# EAGLE board Stepper (EAGLE 9.7.0)

Size 235.86 x 111.59 mm. Coordinates in mm from the lower left corner, seen from the top.
Outline: 0,0 235.86,0 235.86,111.59 0,111.59 0,0
Copper layers (1*16): Top 0.035mm / dielectric 1.5mm / Bottom 0.035mm
Design rules "default": minimum track width 6mil, minimum drill 0.35mm, track to track 6mil, track to pad 6mil, pad to pad 6mil, via to via 6mil, smd to smd 6mil, copper to edge 40mil, drill to drill 6mil, minimum pad ring 10mil, minimum via ring 8mil, stop-mask expansion 4mil, vias tented up to drill 0mil, thermal gap 10mil

## Footprints (pad centres in the part's own frame; a part is rotated, then mirrored left to right if it is on the bottom)
BATTERY-GENERIC = drill 1.118 pad 3.15 octagon: + 2.54,0; - -2.54,0
LEDRD254W60D565H860B_O = drill 0.981 pad 1.581: 1 -1.27,0; 2 1.27,0
LEDRD254W60D565H860B_Y = drill 0.981 pad 1.581: 1 -1.27,0; 2 1.27,0
LEDRD254W60D565H860B_B = drill 0.981 pad 1.581: 1 -1.27,0; 2 1.27,0
LEDRD254W60D565H860B_G = drill 0.981 pad 1.581: 1 -1.27,0; 2 1.27,0
1X06 = drill 1.016 long: 1 -6.35,0; 2 -3.81,0; 3 -1.27,0; 4 1.27,0; 5 3.81,0; 6 6.35,0
RESAD1016W63L850D250B = drill 0.83 pad 1.43: 1 -5.08,0; 2 5.08,0
SWITCH-MOMENTARY-PTH-6.5MM = drill 1.016 pad 1.88: 1 -3.251,2.261; 2 3.251,2.261; 3 -3.251,-2.261; 4 3.251,-2.261
DIP762W53P254L1969H508Q16B = drill 0.743 pad 1.343: 1 -3.81,8.89; 2 -3.81,6.35; 3 -3.81,3.81; 4 -3.81,1.27; 5 -3.81,-1.27; 6 -3.81,-3.81; 7 -3.81,-6.35; 8 -3.81,-8.89; 9 3.81,-8.89; 10 3.81,-6.35; 11 3.81,-3.81; 12 3.81,-1.27; 13 3.81,1.27; 14 3.81,3.81; 15 3.81,6.35; 16 3.81,8.89
ARDUINO-UNO-R3-SHIELD = drill 1.016 pad 1.88: 3.3V 24.13,-2.54; 5V 24.13,0; A0 24.13,12.7; A1 24.13,15.24; A2 24.13,17.78; A3 24.13,20.32; A4 24.13,22.86; A5 24.13,25.4; AREF -24.13,-13.97; D2 -24.13,20.32; D3 -24.13,17.78; D4 -24.13,15.24; D5 -24.13,12.7; D6 -24.13,10.16; D7 -24.13,7.62; D8 -24.13,3.81; D9 -24.13,1.27; D10 -24.13,-1.27; D11 -24.13,-3.81; D12 -24.13,-6.35; D13 -24.13,-8.89; GND@0 24.13,2.54; GND@1 24.13,5.08; GND@2 -24.13,-11.43; IOREF 24.13,-7.62; NC 24.13,-10.16; RES 24.13,-5.08; RX -24.13,25.4; SCL -24.13,-19.05; SDA -24.13,-16.51; TX -24.13,22.86; VIN 24.13,7.62

## Placement (x,y rotation side)
BAT2  9V  [BATTERY-GENERIC]  82.09,91.83 90 top
D1  ORANGE  [LEDRD254W60D565H860B_O]  182.2,101.44 180 top
D2  YELLOW  [LEDRD254W60D565H860B_Y]  195.37,101.85 180 top
D3  BLUE  [LEDRD254W60D565H860B_B]  213.06,102.15 180 top
D4  GREEN  [LEDRD254W60D565H860B_G]  228.61,103.68 180 top
M1  PINHD-1X06_1X06M  [1X06]  140.32,84.96 0 top
R1  2.2  [RESAD1016W63L850D250B]  156.55,49.66 90 top
R2  2.2k  [RESAD1016W63L850D250B]  169.25,49.66 90 top
R3  220  [RESAD1016W63L850D250B]  183.47,92.7 90 top
R4  220  [RESAD1016W63L850D250B]  198.72,93 90 top
R5  220  [RESAD1016W63L850D250B]  215.19,90.26 90 top
R6  220  [RESAD1016W63L850D250B]  229.53,90.87 90 top
S1  SWITCH_MOMENTARY  [SWITCH-MOMENTARY-PTH-6.5MM]  154.01,30.61 90 top
S2  SWITCH_MOMENTARY  [SWITCH-MOMENTARY-PTH-6.5MM]  166.71,30.61 90 top
U1  L293E  [DIP762W53P254L1969H508Q16B]  119.72,30.61 90 top
U2  ARDUINO-UNO-R3-SHIELD  [ARDUINO-UNO-R3-SHIELD]  47.88,29.84 270 top

## Library data of the parts
BAT2 M1 R1-R6 S1 S2 U1 U2 = Tinkercad
D1 = Tinkercad; CATEGORY: Opto-Electronic; SUB-CATEGORY: LED; VALUE: LED_ORANGE
D2 = Tinkercad; CATEGORY: Opto-Electronic; SUB-CATEGORY: LED; VALUE: LED_YELLOW
D3 = Tinkercad; CATEGORY: Opto-Electronic; SUB-CATEGORY: LED; VALUE: LED_BLUE
D4 = Tinkercad; CATEGORY: Opto-Electronic; SUB-CATEGORY: LED; VALUE: LED_GREEN

## Nets
BAT2+: BAT2.+ M1.2
BAT2-: BAT2.- M1.1
D1_A: D1.1 R3.2
D2_A: D2.1 R4.2
D3_A: D3.1 R5.2
D4_A: D4.1 R6.2
M1_5: M1.5 R3.1 U1.3
M1_6: M1.6 R4.1 U1.6
U1_3Y: M1.3 R6.1 U1.11
U1_4Y: M1.4 R5.1 U1.14
U2_5V: S1.1 S1.2 S2.1 S2.2 U1.1 U1.8 U1.9 U1.16 U2.5V
U2_D2: R1.1 S1.3 S1.4 U2.D2
U2_D3: R2.1 S2.3 S2.4 U2.D3
U2_D8: U1.15 U2.D8
U2_D9: U1.10 U2.D9
U2_D10: U1.7 U2.D10
U2_D11: U1.2 U2.D11
U2_GND: D1.2 D2.2 D3.2 D4.2 R1.2 R2.2 U1.4 U1.5 U1.12 U1.13 U2.GND@0 U2.GND@1 U2.GND@2

## Tracks (layer width: path | path; a pad name or v marks a point on that pad's centre or on a via)
BAT2+  (1 unrouted)
BAT2-  (1 unrouted)
D1_A  (1 unrouted)
D2_A  (1 unrouted)
D3_A  (1 unrouted)
D4_A  (1 unrouted)
M1_5  (2 unrouted)
M1_6  (2 unrouted)
U1_3Y  (2 unrouted)
U1_4Y  (2 unrouted)
U2_5V  (8 unrouted)
U2_D2  (3 unrouted)
U2_D3  (3 unrouted)
U2_D8  (1 unrouted)
U2_D9  (1 unrouted)
U2_D10  (1 unrouted)
U2_D11  (1 unrouted)
U2_GND  (12 unrouted)